# Altium PCB бив2-bot_1b.PcbDoc
Units mm, origin at the board's own origin, x right, y up, seen from the top; angles counter-clockwise.
Board outline 33 x 33 mm, 2 copper layers (Top Layer, Bottom Layer), stack 2.071 mm thick; 4 components, 5 nets, 15 pads, 0 vias.
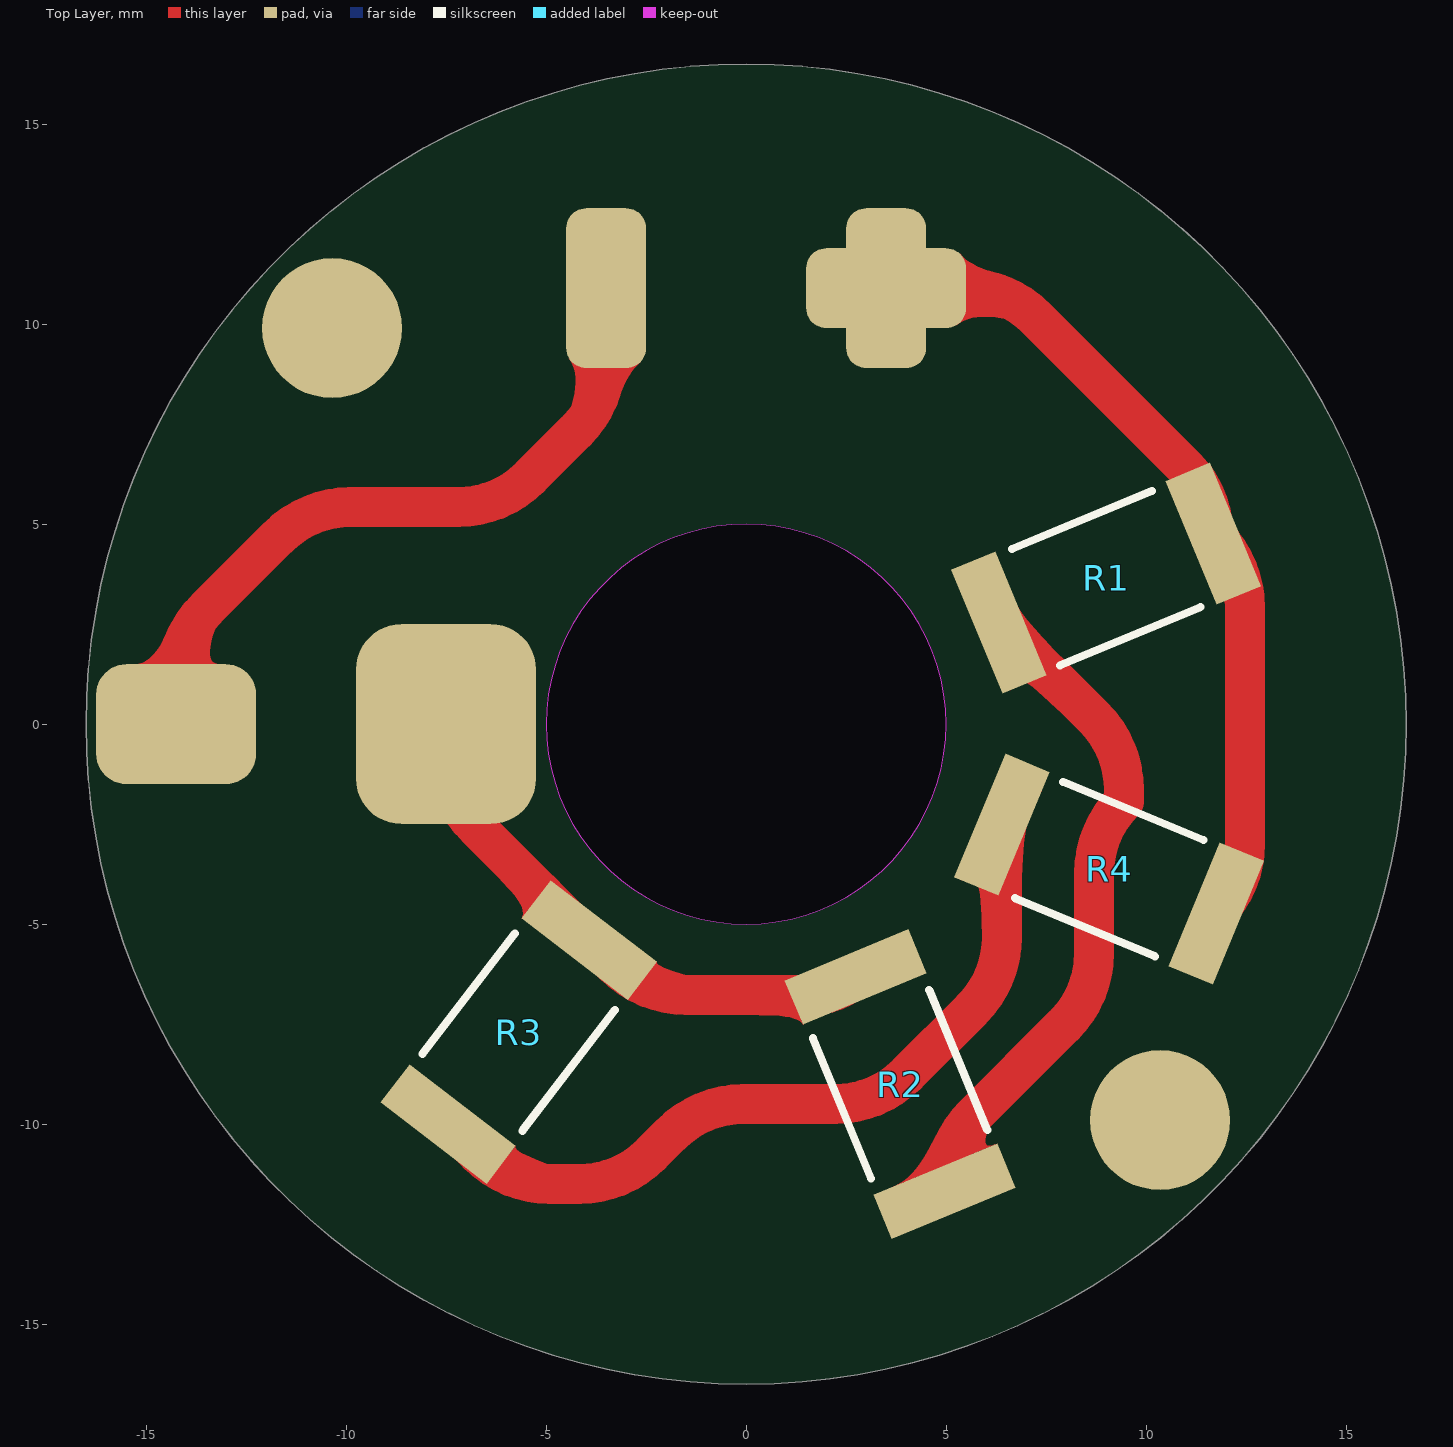
[diagram p0: Top Layer view]
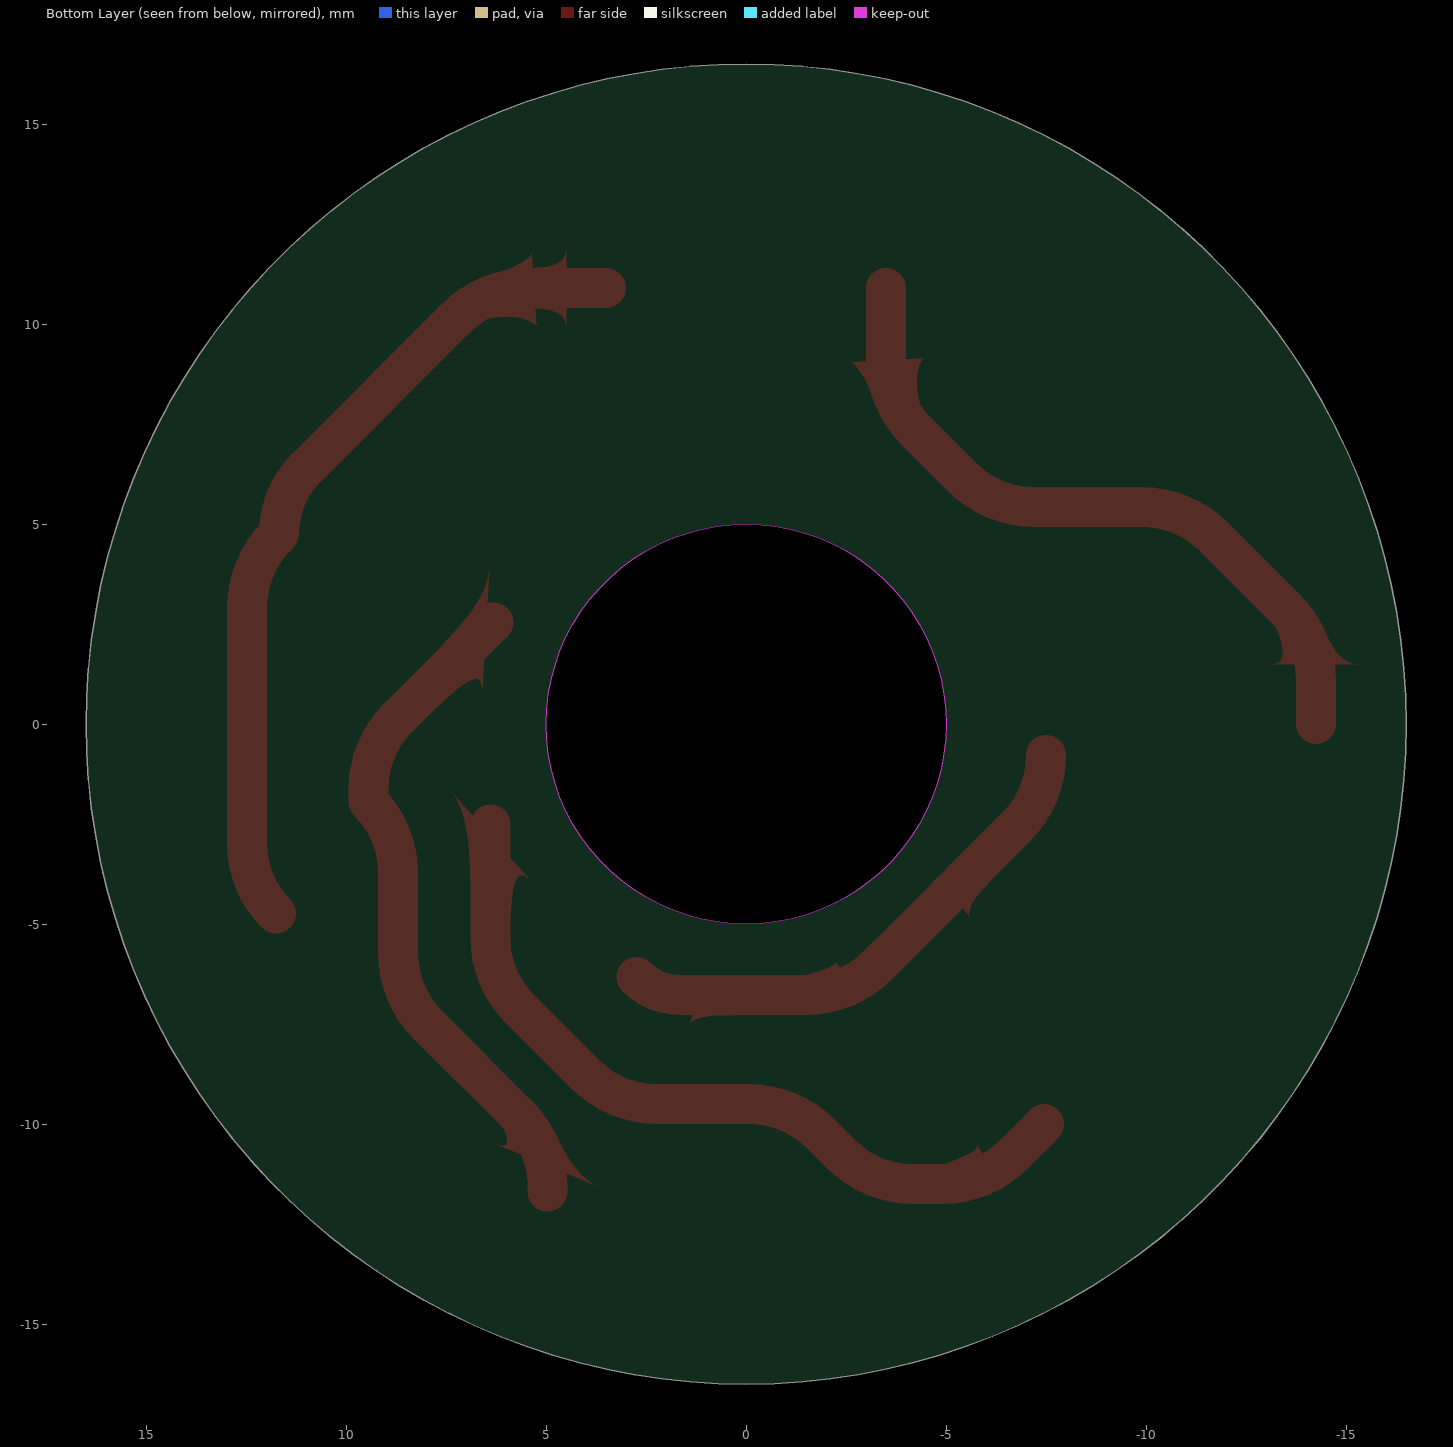
[diagram p1: Bottom Layer view, seen from below]
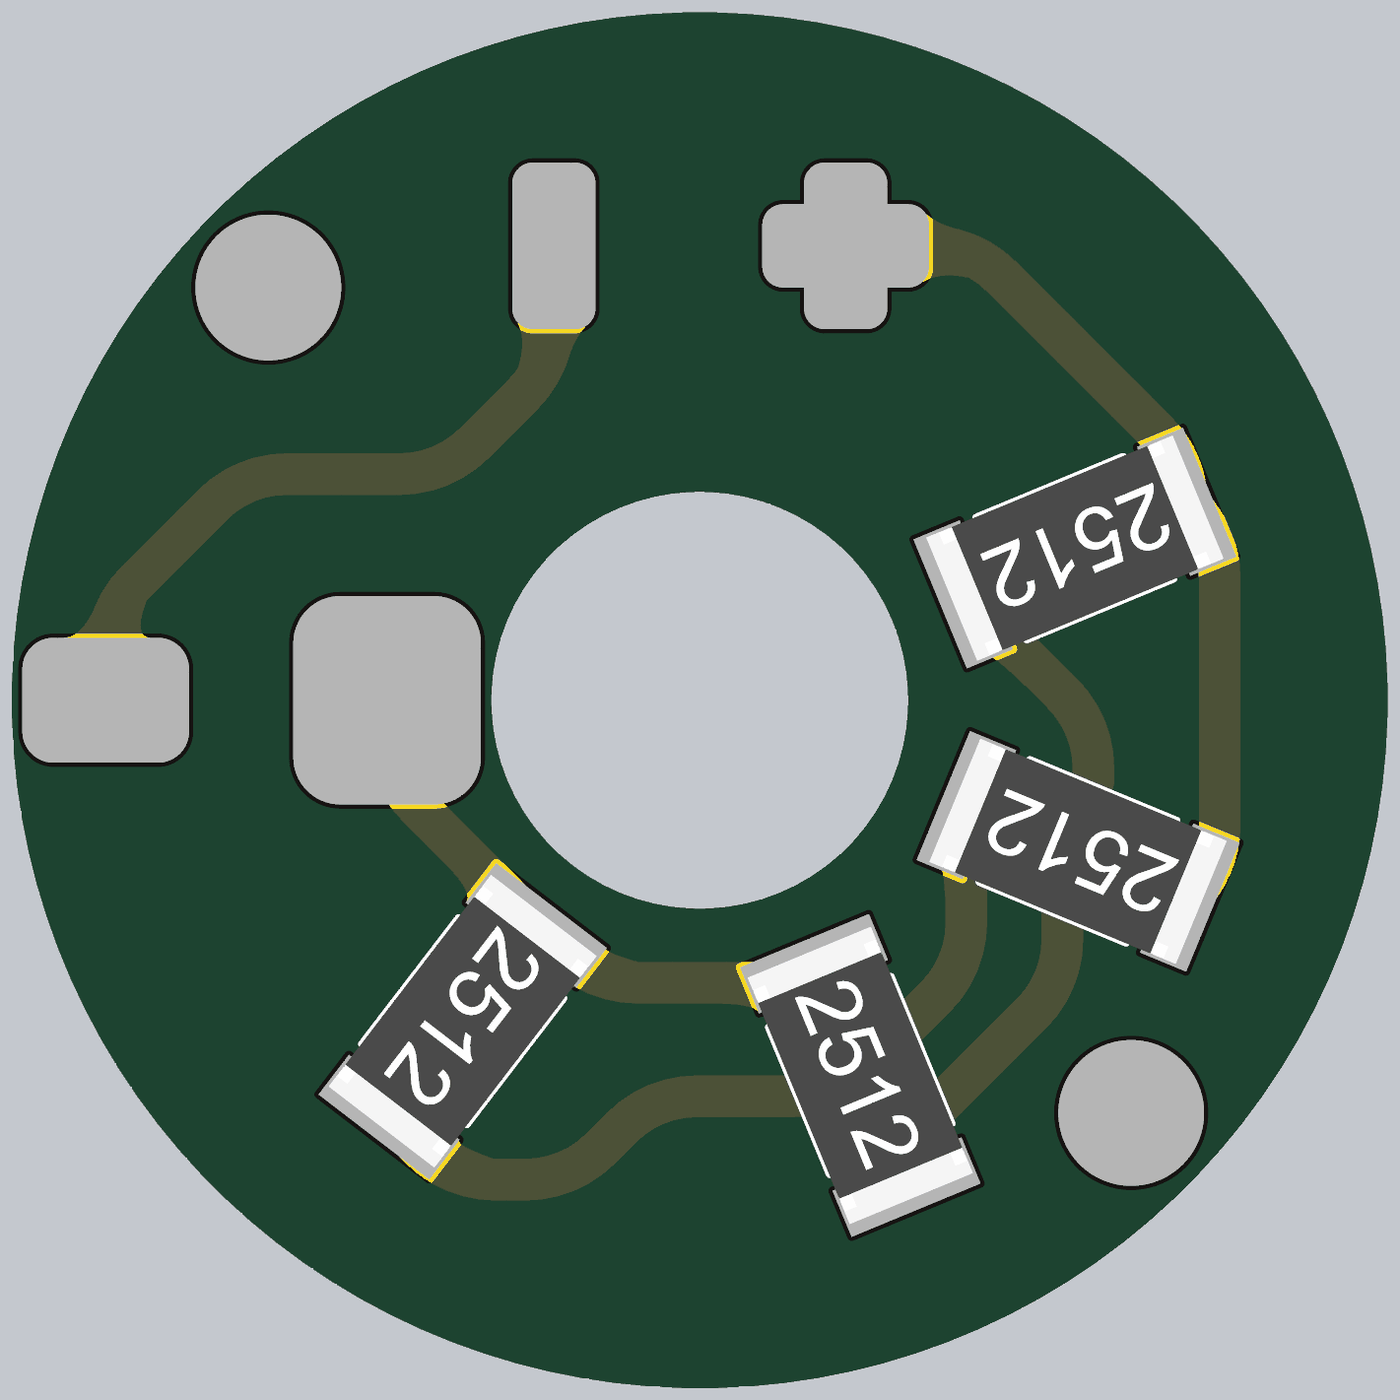
[diagram p2: 3D render of the assembled board from above, using the file's embedded part models]

## Layer stack, top to bottom
Top Solder: solder mask 0.0102, Solder Resist, Dk 3.5
Top Layer: signal copper 0.0356
Dielectric1: core 2, FR-4, Dk 4.8
Bottom Layer: signal copper 0.0356
Bottom Solder: solder mask 0.0102, Solder Resist, Dk 3.5

## Board outline
-16.5,0 ccw(c0,0) 0,-16.5 ccw(c0,0) 16.5,0 ccw(c0,0) 0,16.5 ccw(c0,0)
cut-out: -5,0 ccw(c0,0) 0,-5 ccw(c0,0) 5,0 ccw(c0,0) 0,5 ccw(c0,0)

## Design rules (kind name [scope] priority, off if disabled: settings)
AcuteAngle [All] p1: minimum=4.40000000000000E+0001 checktracksonly=FALSE
Clearance Clearance_Bound [Not (OnBottomLayer Or OnTopLayer) vs IsBoardCutoutRegion Or IsBoardOutline] p1: gap=0.5 ignorepadtopadclearanceinfootprint=FALSE except(0: Arc-Hole Track-Hole SMDPad-Hole THPad-Hole Via-Hole Fill-Hole Poly-Hole Region-Hole Text-Hole)
Clearance Clearance_Poly [inpoly] p2: gap=0.2 ignorepadtopadclearanceinfootprint=FALSE except(0: Arc-Hole Track-Hole SMDPad-Hole THPad-Hole Via-Hole Fill-Hole Poly-Hole Region-Hole Text-Hole)
Clearance Clearance_in [(OnLayer('MidLayer1') OR OnLayer('MidLayer2'))] p3: gap=0.2 ignorepadtopadclearanceinfootprint=FALSE except(0: Arc-Hole Track-Hole SMDPad-Hole THPad-Hole Via-Hole Fill-Hole Poly-Hole Region-Hole Text-Hole)
Clearance Clearance_out [(OnLayer('Bottom Layer') OR OnLayer('Top Layer'))] p4: gap=0.15 ignorepadtopadclearanceinfootprint=FALSE except(0: Arc-Hole Track-Hole SMDPad-Hole THPad-Hole Via-Hole Fill-Hole Poly-Hole Region-Hole Text-Hole)
HoleSize [All] p1: absolutevalues=TRUE maxlimit=2.54 minlimit=0.2 maxpercent=80.000 minpercent=20.000
MinimumAnnularRing [All] p1: minimumring=0.25
MinimumSolderMaskSliver [All] p1: minsoldermaskwidth=0
NetAntennae [All] p1: netantennaetolerance=5
PermittedLayers [All] p1: toplayerpermitted=TRUE bottomlayerpermitted=TRUE
PolygonConnect PolygonConnect_via [isvia] p1: connectstyle=Direct reliefconductorwidth=0.254 reliefentries=4 polygonreliefangle="90 Angle" airgapwidth=0.254
PolygonConnect [All] p2: connectstyle=Relief reliefconductorwidth=0.254 reliefentries=4 polygonreliefangle="45 Angle" airgapwidth=0.254
RoomDefinition бив2-bot_1a [InComponentClass('бив2-bot_1a')] p1: confinementstyle=ConfineIn formatcopy=TRUE lockcomponents=FALSE outline 22.632,-15.075 25.45,-15.075 25.45,-12.85 22.632,-12.85
RoutingVias [All] p1: holewidth=0.3 width=0.8 viastyle="Through Hole" minholewidth=0.2 minwidth=0.6 maxholewidth=0.4 maxwidth=1.27
SMDNeckDown [All] p1: percent=100.000
SMDToCorner [All] p1: distance=59055
SMDToPlane [All] p1: distance=0
SilkToSilkClearance [All] p1: silktosilkclearance=0.15
SilkToSolderMaskClearance SilkscreenOverComponentPads [IsPad] p1: minsilkscreentomaskgap=0.15 clearancetoexposedcopper=TRUE
SolderMaskExpansion [All] p1: expansion=0.1 istentingtop=FALSE
ViasUnderSMD [All] p1: allowed=TRUE
Width [All] p1: maxlimit=3 minlimit=0.15 preferedwidth=0.25 minimp=50.000000 maximp=50.000000 favimp=50.000000
25 further rules are at their usual default settings.

## Components (designator, comment, footprint, x,y, rotation, side; value= is the part's Value field where it differs from the comment)
R1 "3,6" RESC6432(2512)X06L 9,3.65 r202.5 top
R2 "3,6" RESC6432(2512)X06L 3.85,-9 r292.5 top
R3 "3,6" RESC6432(2512)X06L -5.687,-7.7 r232.5 top
R4 "3,6" RESC6432(2512)X06L 9.075,-3.625 r157.5 top

## Footprints (in the part's own frame and the unit in brackets; to place one, negate y for a bottom-side part, rotate by r counter-clockwise, add the part's x,y. Pads: shape width x height; smd on the part's side, far side on the other; paste and mask are expansions set on the pad)
RESC6432(2512)X06L [mm] "Chip Resistor, 2-Leads, Body 6,4x3,2mm, IPC High Density"
  rect 1.2x3.35 smd: 1(-2.9,0) 2(2.9,0)
  silkscreen extent -1.9,-1.58 1.9,1.58, body extent -3.2,-1.6 3.2,1.6, height 0.6

## Part data
R1 R2 R3 R4: library part R2512L, "Резистор"

## Free pads (board coordinates)
  round 3.5 smd: 0(-10.35,9.9) 0(10.35,-9.9)
  rrect50% 4x3 smd: 1(-14.25,0)
  rrect50% 4.5x5 smd: 2(-7.5,0)
  rrect50% 2x4 smd: 3(-3.5,10.9) 3(3.5,10.9)
  rrect50% 4x2 smd: 3(3.5,10.9)

## Nets (pads, with @x,y where several pads share a name; then routed paths per layer and width w, separated by ;. In a path a pad name is that pad's centre, name@x,y a point inside that pad or via, vN(x,y) a via of type N, cw(c..) or ccw(c..) an arc to the next point about the centre after c; other vN are vias at no path point)
-: pad.1 pad.3@-3.5,10.9 | length 17.7
  Top Layer w1: pad.1 -14.25,1.073 cw(c-11.71,1.073) -13.506,2.869 -11.694,4.681 cw(c-9.898,2.885) -9.898,5.425 -7.202,5.425 ccw(c-7.202,7.965) -5.406,6.169 -4.244,7.331 ccw(c-6.04,9.127) -3.5,9.127 pad.3@-3.5,10.9
BAT: pad.2 R2.1 R3.1 | length 13.2
  Top Layer w1: pad.2@-7.5,-0.769 ccw(c-4.96,-0.769) -6.756,-2.565 R3.1 -3.29,-6.031 ccw(c-1.494,-4.235) -1.494,-6.775 1.644,-6.775 ccw(c1.644,-5.224) R2.1
Net+_0: pad.3@3.5,10.9 R1.1 R4.1 | length 20.9
  Top Layer w1: pad.3@3.5,10.9 5.448,10.9 cw(c5.448,8.36) 7.244,10.156 11,6.4 cw(c9.359,4.76) R1.1 ; R1.1@11.731,4.708 cw(c9.935,2.912) 12.475,2.912 12.475,-2.995 cw(c10.014,-2.995) R4.1
NetR1_2: R1.2 R2.2 | length 17
  Top Layer w1: R2.2 4.96,-11.567 cw(c7.5,-11.567) 5.704,-9.771 7.956,-7.519 ccw(c6.16,-5.723) 8.7,-5.723 8.7,-3.727 cw(c11.24,-3.727) 9.444,-1.931 9.444,-1.635 ccw(c6.904,-1.635) 8.7,0.161 R1.2 ccw(c6.372,2.592) R1.2@6.372,2.519
NetR3_2: R3.2 R4.2 | length 19.9
  Top Layer w1: R3.2 -6.697,-10.756 ccw(c-4.901,-8.96) -4.901,-11.5 -4.177,-11.5 ccw(c-4.177,-8.96) -2.381,-10.756 -1.869,-10.244 cw(c-0.073,-12.04) -0.073,-9.5 2.223,-9.5 ccw(c2.223,-6.96) 4.019,-8.756 5.652,-7.123 ccw(c3.856,-5.327) 6.396,-5.327 R4.2

## Silkscreen, mask and mechanical layers (free items; w line width, h text height)
Mechanical 3:
  lines w0.1: -16.35,-2.2 -14.075,-2.2 ; -16.35,2.195 -14.15,2.195 cw(c-14.15,0) -14.195,-2.195 ; -15.244,-6.281 -15.225,-6.3 ; -10.075,-9.725 -10.075,3.25 -7.35,5.975 6.15,5.975 11.35,8.2 ; -10.071,-9.725 ccw(c0,0) -2.446,-13.785 cw(c0,-14.3) 2.446,-13.785 ccw(c0,0) 8.292,-11.28 cw(c10.366,-9.884) 11.662,-7.746 ccw(c0,0) 11.348,8.199 ; -5.725,10.825 -5.725,15.45 ; -5.72,10.945 ccw(c-3.525,10.9) -1.33,10.9 -1.33,16.4 ; 1.3,10.825 1.3,16.45 ; 1.305,10.945 ccw(c3.5,10.9) 5.695,10.9 5.695,15.43
Mechanical 4:
  circle w0.1: c0,0 r5
  circle w0.1: c0,0 r16.5